# Altium PCB Tigershark 3D R2.3a - TR.PcbDoc (part 4 of 4)
Units mil, origin at the board's own origin, x right, y up, seen from the top; angles counter-clockwise.
Board outline 4100 x 4050 mil, 4 copper layers (Top Layer, Groun Plane, Power Plane, Bottom Layer), stack 61.73 mil thick; 365 components, 237 nets, 1145 pads, 790 vias.
Unrouted connection lines stored in the file: 214.
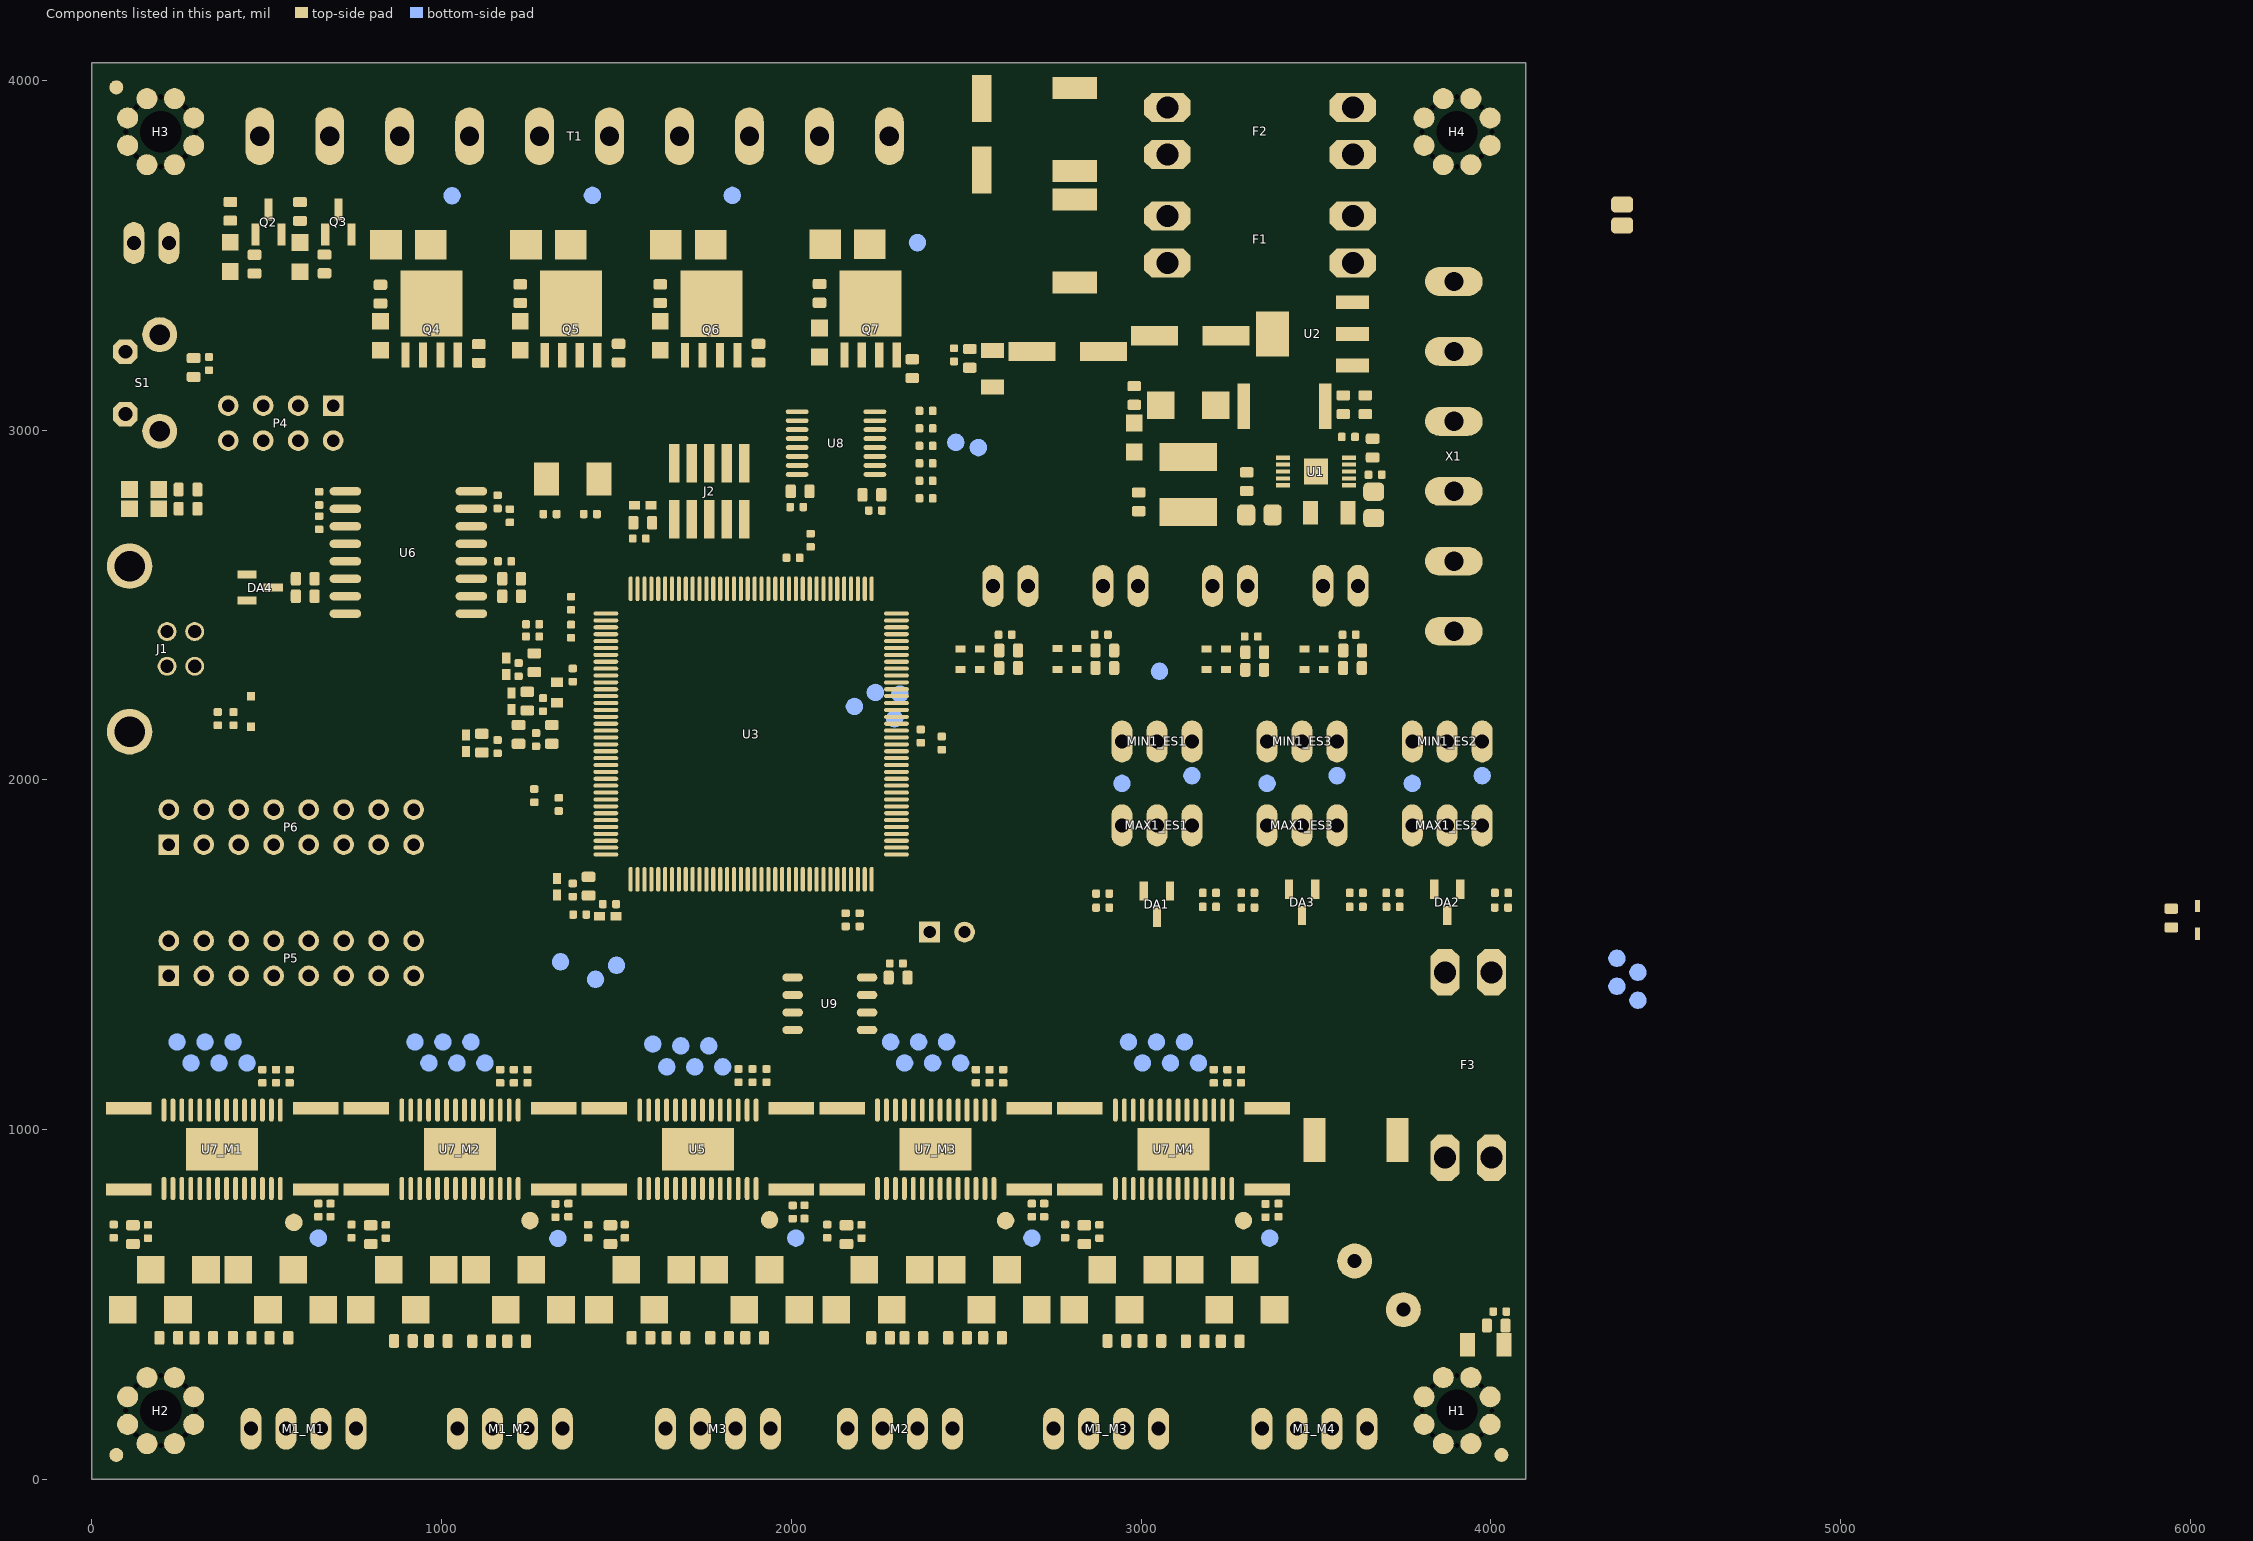
[diagram p6: the components of this part, seen from the top]

## Silkscreen, mask and mechanical layers (free items; w line width, h text height) (continued)
Bottom Overlay:
  drawing of 4 lines, arcs and shapes, not listed
  text "G" at 11640.52,4072.26 h310
  text "SPI MOSI" at 2260,3310 h90 r90
  text "SPI MISO" at 2360,3295 h90 r90
  text "I2C SDA" at 2155,3265 h90 r90
  text "3V3 DC" at 2455,3215 h90 r90
  text "RX" at 2055,3090 h90 r90
  text "GND" at 2455,2775 h90 r90
  text "TX" at 2055,2765 h90 r90
  text "I2C SCL" at 2155,2765 h90 r90
  text "SPI SCLK" at 2355,2765 h90 r90
  text "SPI CS EXP1" at 2260,2760 h90 r90
  text "MOD7E0" at 340,2460 h90 r270
  text "MOD7E1" at 440,2460 h90 r270
  text "MOD7E2" at 540,2455 h90 r270
  text "STEP7" at 640,2455 h90 r270
  text "EN7" at 735,2450 h90 r270
  text "DIR7" at 835,2450 h90 r270
  text "REF7" at 935,2445 h90 r270
  text "3V3" at 1035,2445 h90 r270
  text "X-MIN" at 3170,2205 h90 r90
  text "Y-MIN" at 3590,2190 h90 r90
  text "Z-MIN" at 4000,2185 h90 r90
  text "3V3" at 2975,2135 h90 r90
  text "3V3" at 3800,2120 h90 r90
  text "3V3" at 3390,2110 h90 r90
  text "MOD6E0" at 335,2105 h90 r270
  text "MOD6E1" at 435,2105 h90 r270
  text "MOD6E2" at 535,2100 h90 r270
  text "STEP6" at 635,2100 h90 r270
  text "EN6" at 730,2095 h90 r270
  text "DIR6" at 830,2095 h90 r270
  text "REF6" at 930,2090 h90 r270
  text "GND" at 1030,2090 h90 r270
  text "GND" at 3020,2000 h90 r270
  text "GND" at 3870,1985 h90 r270
  text "GND" at 3440,1980 h90 r270
  text "3V3" at 3185,1615 h90 r90
  text "Y-MAX" at 3355,1615 h90 r90
  text "3V3" at 3605,1615 h90 r90
  text "X-MAX" at 2940,1610 h90 r90
  text "Z-MAX" at 3775,1610 h90 r90
  text "3V3" at 4020,1610 h90 r90
  text "GND" at 3055,1470 h90 r270
  text "GND" at 3475,1465 h90 r270
  text "GND" at 3880,1465 h90 r270
  text "I2C_SDA" at 185,915 h90 r270
  text "MSIO" at 285,915 h90 r270
  text "MOSI" at 385,910 h90 r270
  text "RXD0" at 485,910 h90 r270
  text "MCDZ0" at 580,905 h90 r270
  text "MCCK" at 680,905 h90 r270
  text "MCCDZ" at 780,900 h90 r270
  text "3V3" at 880,900 h90 r270
  text "I2C_SCL" at 180,560 h90 r270
  text "SCLK" at 280,560 h90 r270
  text "EXP_CS2" at 380,555 h90 r270
  text "TXD0" at 480,555 h90 r270
  text "MCDZ1" at 575,550 h90 r270
  text "MCDZ2" at 675,550 h90 r270
  text "MCDZ3" at 775,545 h90 r270
  text "GND" at 875,545 h90 r270
  text "X-A1" at 430,210 h90 r270
  text "X-A2" at 530,210 h90 r270
  text "Y-A1" at 1020,210 h90 r270
  text "Y-A2" at 1120,210 h90 r270
  text "Z-A1" at 1615,210 h90 r270
  text "Z-A2" at 1715,210 h90 r270
  text "Z-A1" at 2135,210 h90 r270
  text "Z-A2" at 2235,210 h90 r270
  text "E0-A1" at 2725,210 h90 r270
  text "E0-A2" at 2825,210 h90 r270
  text "E1-A1" at 3320,210 h90 r270
  text "E1-A2" at 3420,210 h90 r270
  text "X-B1" at 630,205 h90 r270
  text "X-B2" at 730,205 h90 r270
  text "Y-B1" at 1220,205 h90 r270
  text "Y-B2" at 1320,205 h90 r270
  text "Z-B1" at 1815,205 h90 r270
  text "Z-B2" at 1915,205 h90 r270
  text "Z-B1" at 2335,205 h90 r270
  text "Z-B2" at 2435,205 h90 r270
  text "E0-B1" at 2925,205 h90 r270
  text "E0-B2" at 3025,205 h90 r270
  text "E1-B1" at 3520,205 h90 r270
  text "E1-B2" at 3620,205 h90 r270
Mechanical 15:
  the board outline again, w10

## Dimensions
0,4050 to 4100,4050 on Mechanical 1
0,4050 to 0,0 on Mechanical 1

## Text inside footprints (layer, text, board x,y; h text height)
C7: Top Overlay "+" at 3510.18,680.27 h77.5 r315; Top Overlay "+" at 3448.94,741.52 h77.5 r315
FAN-1: Mechanical 16 "1" at 282.5,3597.5 h62 r180
MAX1_ES1: Mechanical 16 "1" at 2882.5,1807.5 h62
MAX1_ES2: Mechanical 16 "1" at 3712.5,1807.5 h62
MAX1_ES3: Mechanical 16 "1" at 3297.5,1807.5 h62
MIN1_ES1: Mechanical 16 "1" at 3207.5,2172.5 h62 r180
MIN1_ES2: Mechanical 16 "1" at 4037.5,2172.5 h62 r180
MIN1_ES3: Mechanical 16 "1" at 3622.5,2172.5 h62 r180
P2_TR1: Mechanical 16 "1" at 3053.5,2617.07 h62 r180
P2_TR2: Mechanical 16 "1" at 2738.5,2617.07 h62 r180
P2_TR3: Mechanical 16 "1" at 3682.03,2617.5 h62 r180
P2_TR4: Mechanical 16 "1" at 3366.56,2617.03 h62 r180
T1: Top Overlay "1" at 395,3755 h77.5; Top Overlay "2" at 580,3755 h77.5; Top Overlay "3" at 780,3755 h77.5; Top Overlay "4" at 980,3755 h77.5
U3: Top Overlay "TQFP 144" at 1778.05,2228.46 h49.6 r270; Top Overlay "R" at 1833.56,1983.83 h37.2 r270
X1: Top Overlay "6" at 3809,2525 h77.5 r270; Top Overlay "5" at 3809,2725 h77.5 r270; Top Overlay "1" at 3809,3510 h77.5 r270; Top Overlay "2" at 3809,3325 h77.5 r270; Top Overlay "3" at 3809,3125 h77.5 r270; Top Overlay "4" at 3809,2925 h77.5 r270